# Altium PCB Source_Trans.PcbDoc
Units mil, origin at the board's own origin, x right, y up, seen from the top; angles counter-clockwise.
Board outline 2800 x 3145 mil, 2 copper layers (Top Layer, Bottom Layer); 21 components, 6 nets, 74 pads, 479 vias.
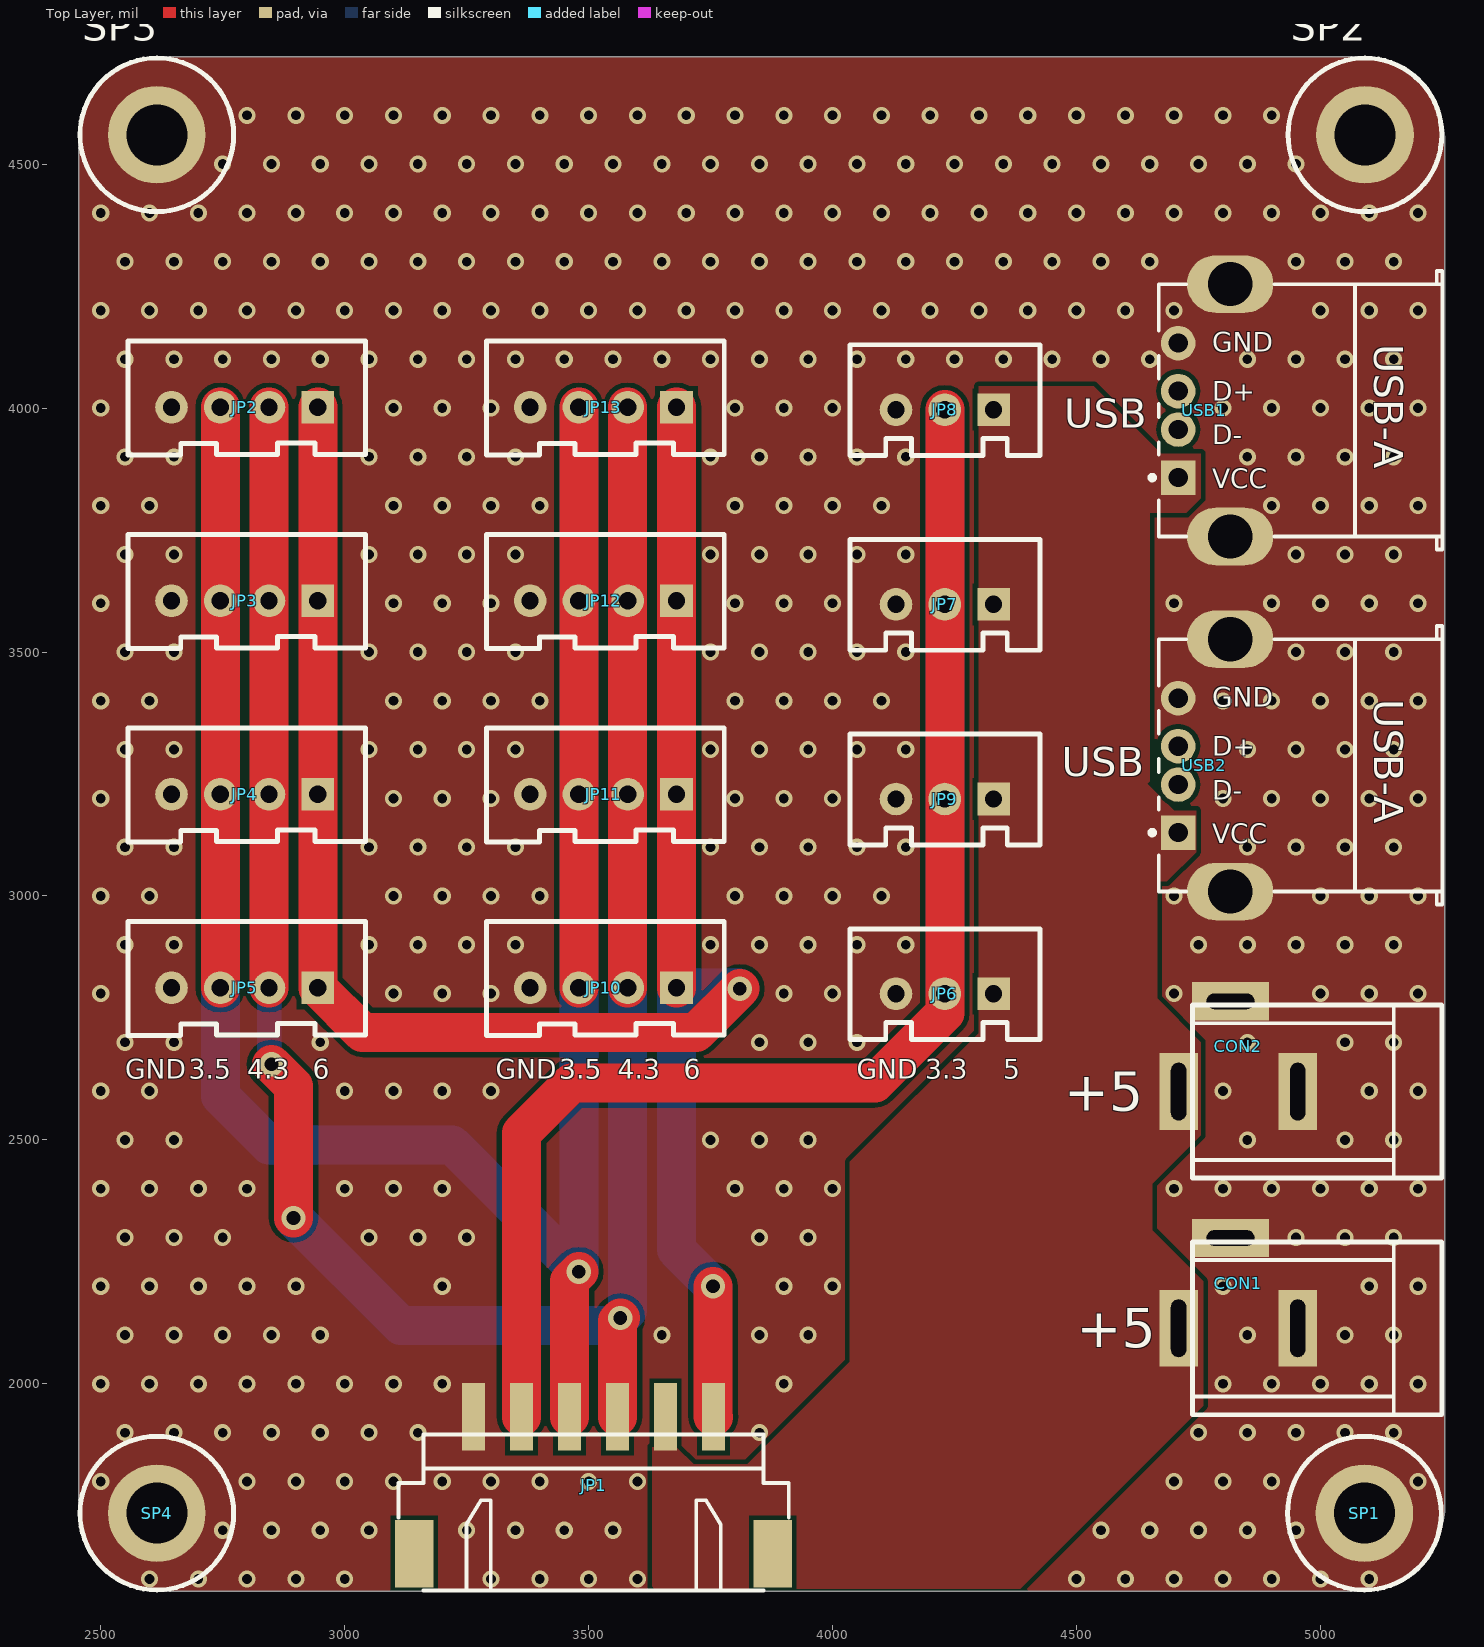
[diagram p0: Top Layer view]
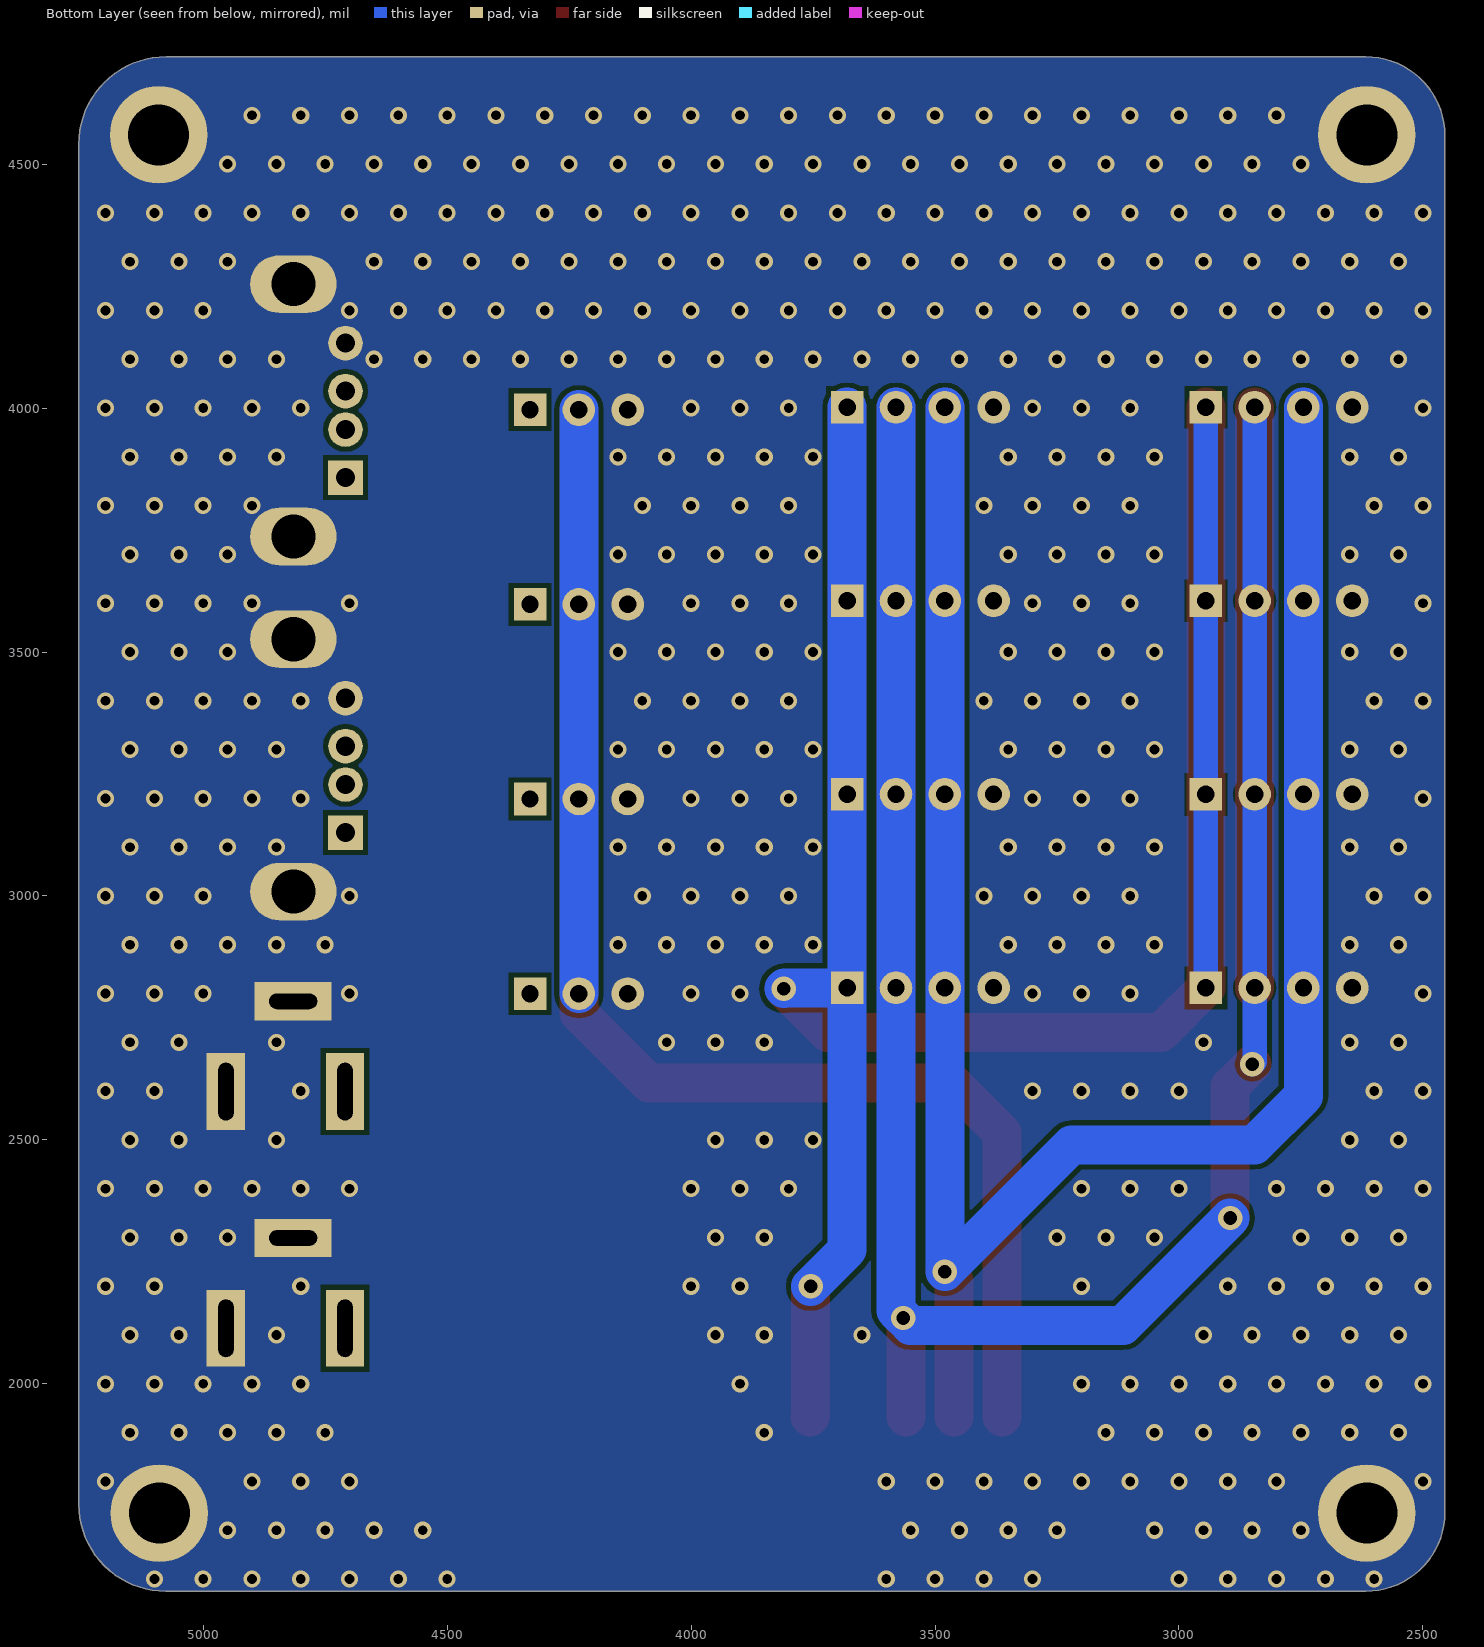
[diagram p1: Bottom Layer view, seen from below]
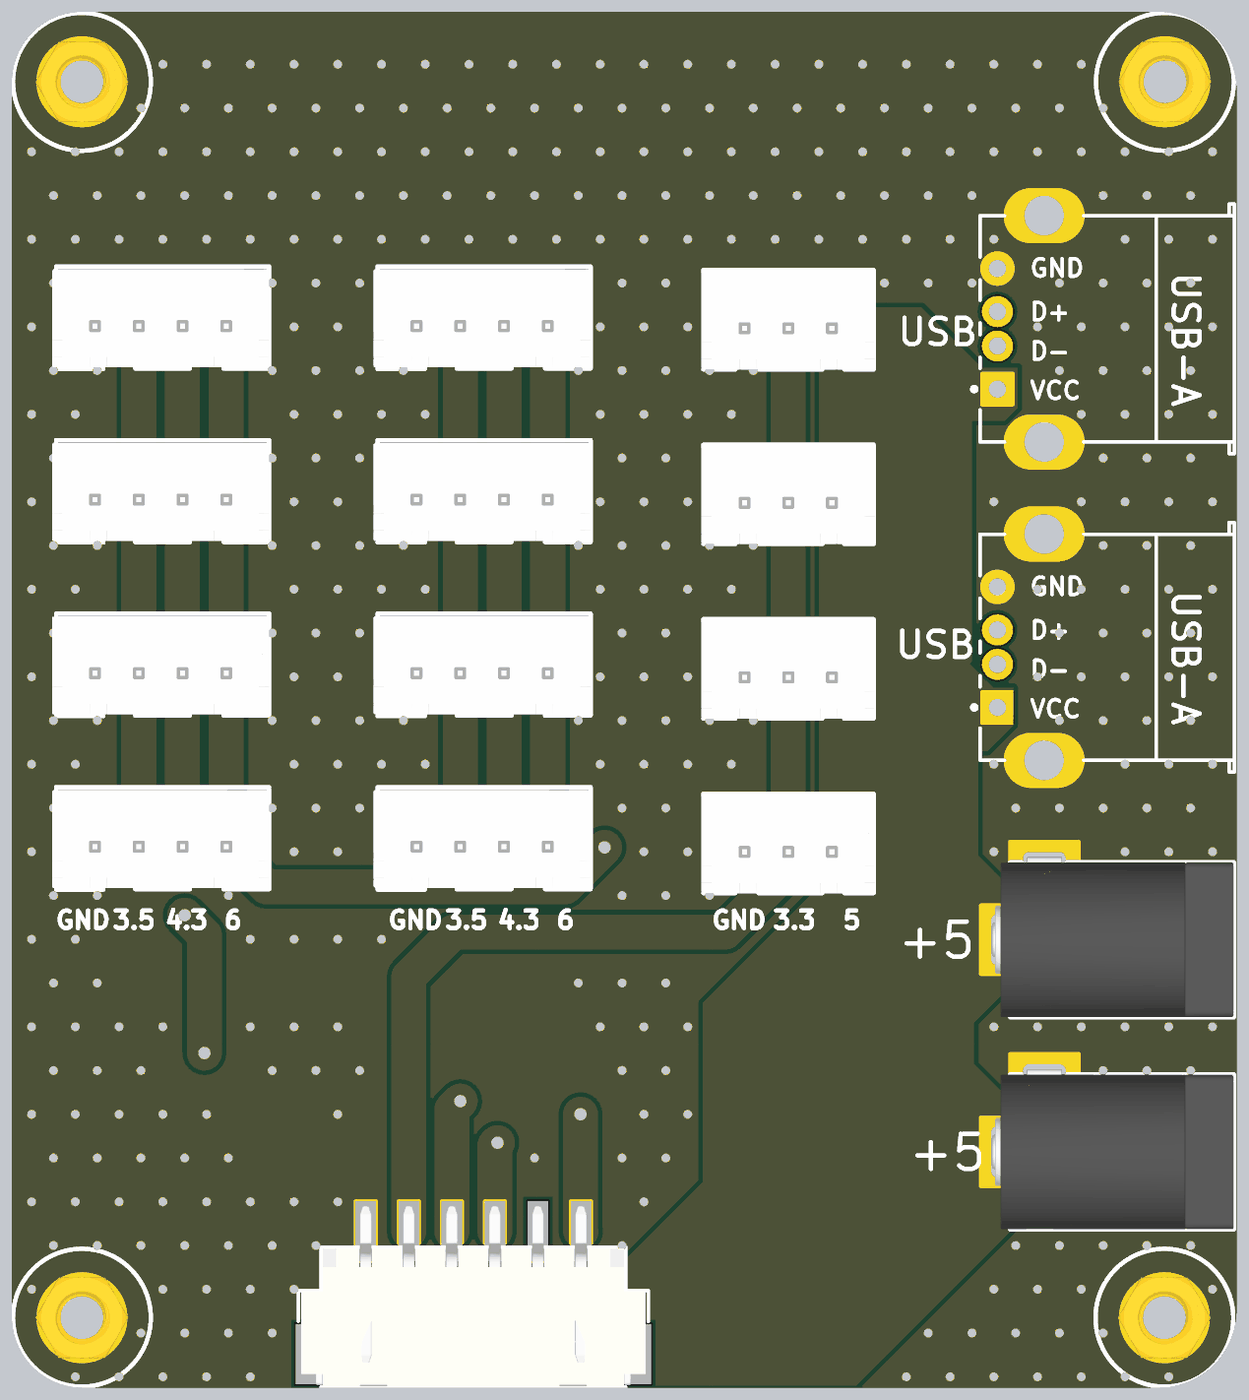
[diagram p2: 3D render of the assembled board from above, using the file's embedded part models]

## Layer stack, top to bottom
Top Solder: solder mask 0.4, Solder Resist, Dk 3.5
Top Layer: signal copper 1.4
Dielectric 1: dielectric 12.6, FR-4, Dk 4.8
Bottom Layer: signal copper 1.4
Bottom Solder: solder mask 0.4, Solder Resist, Dk 3.5

## Board outline
2455,1737.08 2455,4557.92 cw(c2617.08,4557.92) 2617.08,4720 5075.84,4720 cw(c5075.84,4540.84) 5255,4540.84 5255,1753.48 cw(c5076.52,1753.48) 5076.52,1575 2617.08,1575 cw(c2617.08,1737.08)

## Design rules (kind name [scope] priority, off if disabled: settings)
Clearance [All] p1: gap=10 ignorepadtopadclearanceinfootprint=FALSE except(0: Arc-Hole Track-Hole SMDPad-Hole THPad-Hole Via-Hole Fill-Hole Poly-Hole Region-Hole Text-Hole)
PolygonConnect [All] p1: connectstyle=Direct reliefconductorwidth=10 reliefentries=4 polygonreliefangle="90 Angle" airgapwidth=10
RoutingVias [All] p1: holewidth=28 width=50 viastyle="Through Hole" minholewidth=28 minwidth=50 maxholewidth=28 maxwidth=50
SolderMaskExpansion [All] p1: expansion=4 istentingtop=FALSE
Width [All] p1: maxlimit=80 minlimit=10 preferedwidth=10 minimp=50.000000 maximp=50.000000 favimp=50.000000
30 further rules are at their usual default settings.

## Components (designator, comment, footprint, x,y, rotation, side; value= is the part's Value field where it differs from the comment)
CON1 "3.5*1.3" DC-005 4953.39,2113.99 r0 top
CON2 "3.5*1.3" DC-005 4953.39,2598.99 r0 top
JP1 "HDR-1X6" XH2.54-WS-6P 3510,1736.46 r0 top
JP2 "HDR-1X4" XH2.54-LI-4P 2795,4001.67 r180 top
JP3 "HDR-1X4" XH2.54-LI-4P 2795,3605 r180 top
JP4 "HDR-1X4" XH2.54-LI-4P 2795,3208.33 r180 top
JP5 "HDR-1X4" XH2.54-LI-4P 2795,2811.67 r180 top
JP6 "HDR-1X3" XH2.54-LI-3P 4230,2799.67 r180 top
JP7 "HDR-1X3" XH2.54-LI-3P 4230,3597.67 r180 top
JP8 "HDR-1X3" XH2.54-LI-3P 4230,3996.67 r180 top
JP9 "HDR-1X3" XH2.54-LI-3P 4230,3198.67 r180 top
JP10 "HDR-1X4" XH2.54-LI-4P 3530,2811.67 r180 top
JP11 "HDR-1X4" XH2.54-LI-4P 3530,3208.33 r180 top
JP12 "HDR-1X4" XH2.54-LI-4P 3530,3605 r180 top
JP13 "HDR-1X4" XH2.54-LI-4P 3530,4001.67 r180 top
SP1 "M3铜柱" M3x4_L 5090,1735 r0 top
SP2 "M3铜柱" M3x4_L 5091.18,4560 r0 top
SP3 "M3铜柱" M3x4_L 2615,4560 r0 top
SP4 "M3铜柱" M3x4_L 2615,1735 r0 top
USB1 "USB" USB-A/S_A 4708.31,3995.33 r0 top
USB2 "USB" USB-A/S_A 4708.31,3267.65 r0 top

## Footprints (in the part's own frame and the unit in brackets; to place one, negate y for a bottom-side part, rotate by r counter-clockwise, add the part's x,y. Pads: shape width x height; smd on the part's side, far side on the other; paste and mask are expansions set on the pad)
DC-005 [mm] "5.5*2.1mm，DC30V,2.5A"
  rect 2x4 hole 0.8 slot 3 at 90 deg: 1(-6.2,0) 2(0,0)
  rect 4x2 hole 0.8 slot 2.5 at 0 deg: 3(-3.5,4.7)
  silkscreen extent -5.48,-4.5 7.5,4.5, body extent -6.55,-4.5 7.5,4.8, height 11.2
M3x4_L [mil] "M3铜柱，长：4mm"
  round 200 hole 125: 1(0,0)
  silkscreen extent -157,-157 157,157, body extent -106,-93 106,93, height 159
USB-A/S_A [mm] "A型直插母头，"
  rect 1.8x1.8 hole 1: 1(0,-3.5)
  round 1.8 hole 1: 2(0,-1) 3(0,1) 4(0,3.5)
  oval 4.5x3 hole 2.3: 4(2.71,-6.57) 4(2.71,6.57)
  silkscreen extent -1.47,-7.25 13.75,7.25, body extent -0.6,-7.34 13.7,7.34, height 6.8
XH2.54-LI-3P [mm] "接插件，3P"
  rect 1.7x1.7 hole 0.9: 1(-2.54,0)
  round 1.7 hole 0.9: 2(0,0) 3(2.54,0)
  silkscreen extent -4.95,-3.38 4.93,2.39, body extent -5.04,-3.3 5.04,2.4, height 7.03
XH2.54-LI-4P [mm] "接插件，4P"
  rect 1.7x1.7 hole 0.9: 1(-3.81,0)
  round 1.7 hole 0.9: 2(-1.27,0) 3(1.27,0) 4(3.81,0)
  silkscreen extent -6.3,-3.45 6.07,2.49, body extent -6.31,-3.3 6.31,2.4, height 7.03
XH2.54-WS-6P [mm] "长：20mm，宽：8mm，高：6.1mm"
  rect 2x3.5 smd: 0(-9.327,-2.15) 0(9.327,-2.15)
  rect 1.2x3.5 smd: 1(-6.25,4.981) 2(-3.75,4.981) 3(-1.25,4.981) 4(1.25,4.981) 5(3.75,4.981) 6(6.25,4.981)
  silkscreen extent -10.16,-4.06 10.16,4.06, body extent -10,-4 10,6.42, height 6.05

## Part data
CON1 CON2: library part P-DC, "低压电源接口", BOM名称=DC电源接口
JP1: library part "Header 6", "6P接插件", BOM名称=6P接插件
JP2 JP3 JP4 JP5 JP10 JP11 JP12 JP13: library part "Header 4", "4P接插件", BOM名称=4P接插件
JP6 JP7 JP8 JP9: library part "Header 3", "3P接插件", BOM名称=3P接插件
SP1 SP2 SP3 SP4: library part 铜柱小焊盘, "铜柱", BOM名称=铜柱
USB1 USB2: library part USB-A/S, "USB-A型母接口", BOM名称=USB-A型母接口

## Via types
v1: diameter 35, hole 20, Top Layer to Bottom Layer, tented both sides, 473 vias
v2: diameter 50, hole 28, Top Layer to Bottom Layer, tented both sides, 6 vias

## Nets (pads, with @x,y where several pads share a name; then routed paths per layer and width w, separated by ;. In a path a pad name is that pad's centre, name@x,y a point inside that pad or via, vN(x,y) a via of type N, cw(c..) or ccw(c..) an arc to the next point about the centre after c; other vN are vias at no path point)
3.3: JP1.2 JP6.2 JP7.2 JP8.2 JP9.2 | length 3984.7
  Top Layer w80: JP1.2 3362.36,2514.03 3465,2616.67 4086.67,2616.67 4230,2760 JP6.2 JP9.2 JP7.2 JP8.2
  Bottom Layer w80: JP6.2 JP9.2 JP7.2 JP8.2
3.5: JP1.3 JP2.3 JP3.3 JP4.3 JP5.3 JP10.3 JP11.3 JP12.3 JP13.3 | length 6752.8
  Top Layer w80: JP5.3 JP4.3 JP3.3 JP2.3 ; JP1.3 3460.79,2210.79 v2(3480,2230) ; JP10.3 JP11.3 JP12.3 JP13.3
  Bottom Layer w80: JP2.3 JP3.3 JP4.3 JP5.3 2745,2590 2845,2490 3220,2490 v2(3480,2230) JP11.3 JP12.3 JP13.3
4.3: JP1.4 JP2.2 JP3.2 JP4.2 JP5.2 JP10.2 JP11.2 JP12.2 JP13.2 | length 6907.4
  Top Layer w80: JP5.2 JP4.2 JP3.2 JP2.2 ; v2(2850,2655) 2895,2610 v2(2895,2340) ; JP1.4 3559.21,2129.21 v2(3565,2135) ; JP10.2 JP11.2 JP12.2 JP13.2
  Bottom Layer w50: JP2.2 JP3.2 JP4.2 JP5.2 2845,2660 v2(2850,2655)
  Bottom Layer w80: v2(2895,2340) 3115,2120 3550,2120 3580,2150 JP10.2 JP11.2 JP12.2 JP13.2
6: JP1.6 JP2.1 JP3.1 JP4.1 JP5.1 JP10.1 JP11.1 JP12.1 JP13.1 | length 6741.6
  Top Layer w80: JP2.1 JP3.1 JP4.1 JP5.1 3036.67,2720 3720,2720 v2(3810,2810) ; JP10.1 JP11.1 JP12.1 JP13.1 ; v2(3755,2200) 3755,1933.62 JP1.6
  Bottom Layer w50: JP5.1 JP4.1 JP3.1 JP2.1
  Bottom Layer w80: JP13.1 JP12.1 JP11.1 JP10.1 ; v2(3755,2200) 3680,2275 JP10.1 ; v2(3810,2810) 3808.33,2811.67 JP10.1
+5: CON1.1 CON2.1 JP1.5 JP6.1 JP7.1 JP8.1 JP9.1 USB1.1 USB2.1
GND: CON1.2 CON1.3 CON2.2 CON2.3 JP1.1 JP2.4 JP3.4 JP4.4 JP5.4 JP6.3 JP7.3 JP8.3 JP9.3 JP10.4 JP11.4 JP12.4 JP13.4 SP1.1 SP2.1 SP3.1 SP4.1 USB1.4 USB2.4
  other v1: 2600,1600 2700,1600 2800,1600 2900,1600 3000,1600 3300,1600 3400,1600 3500,1600 3600,1600 4500,1600 4600,1600 4700,1600 4800,1600 4900,1600 5000,1600 5100,1600 2750,1700 2850,1700 2950,1700 3050,1700 3250,1700 3350,1700 3450,1700 3550,1700 4550,1700 4650,1700 4750,1700 4850,1700 4950,1700 2500,1800 2800,1800 2900,1800 3000,1800 3100,1800 3200,1800 3300,1800 3400,1800 3500,1800 3600,1800 4700,1800 4800,1800 4900,1800 5200,1800 2550,1900 2650,1900 2750,1900 2850,1900 2950,1900 3050,1900 3150,1900 3850,1900 4750,1900 4850,1900 4950,1900 5050,1900 5150,1900 2500,2000 2600,2000 2700,2000 2800,2000 2900,2000 3000,2000 3100,2000 3200,2000 3900,2000 4800,2000 4900,2000 5000,2000 5100,2000 5200,2000 2550,2100 2650,2100 2750,2100 2850,2100 2950,2100 3650,2100 3850,2100 3950,2100 4850,2100 5050,2100 5150,2100 2500,2200 2600,2200 2700,2200 2800,2200 2900,2200 3200,2200 3900,2200 4000,2200 4800,2200 5100,2200 5200,2200 2550,2300 2650,2300 2750,2300 3050,2300 3150,2300 3250,2300 3850,2300 3950,2300 4950,2300 5050,2300 5150,2300 2500,2400 2600,2400 2700,2400 2800,2400 3000,2400 3100,2400 3200,2400 3800,2400 3900,2400 4000,2400 4700,2400 4800,2400 4900,2400 5000,2400 5100,2400 5200,2400 2550,2500 2650,2500 3750,2500 3850,2500 3950,2500 4850,2500 5050,2500 5150,2500 2500,2600 2600,2600 3000,2600 3100,2600 3200,2600 3300,2600 4800,2600 5100,2600 5200,2600 2550,2700 2650,2700 2950,2700 3850,2700 3950,2700 4050,2700 4850,2700 5050,2700 5150,2700 2500,2800 3100,2800 3200,2800 3300,2800 3900,2800 4000,2800 4700,2800 5000,2800 5100,2800 5200,2800 2550,2900 2650,2900 3050,2900 3150,2900 3250,2900 3350,2900 3750,2900 3850,2900 3950,2900 4050,2900 4150,2900 4750,2900 4850,2900 4950,2900 5050,2900 5150,2900 2500,3000 2600,3000 3100,3000 3200,3000 3300,3000 3400,3000 3800,3000 3900,3000 4000,3000 4100,3000 4700,3000 5000,3000 5100,3000 5200,3000 2550,3100 2650,3100 3050,3100 3150,3100 3250,3100 3350,3100 3750,3100 3850,3100 3950,3100 4050,3100 4150,3100 4850,3100 4950,3100 5050,3100 5150,3100 2500,3200 3100,3200 3200,3200 3300,3200 3800,3200 3900,3200 4000,3200 4800,3200 4900,3200 5000,3200 5100,3200 5200,3200 2550,3300 2650,3300 3050,3300 3150,3300 3250,3300 3350,3300 3750,3300 3850,3300 3950,3300 4050,3300 4150,3300 4850,3300 4950,3300 5050,3300 5150,3300 2500,3400 2600,3400 3100,3400 3200,3400 3300,3400 3400,3400 3800,3400 3900,3400 4000,3400 4100,3400 4800,3400 4900,3400 5000,3400 5100,3400 5200,3400 2550,3500 2650,3500 3050,3500 3150,3500 3250,3500 3350,3500 3750,3500 3850,3500 3950,3500 4050,3500 4150,3500 4950,3500 5050,3500 5150,3500 2500,3600 3100,3600 3200,3600 3300,3600 3800,3600 3900,3600 4000,3600 4700,3600 4900,3600 5000,3600 5100,3600 5200,3600 2550,3700 2650,3700 3050,3700 3150,3700 3250,3700 3350,3700 3750,3700 3850,3700 3950,3700 4050,3700 4150,3700 4950,3700 5050,3700 5150,3700 2500,3800 2600,3800 3100,3800 3200,3800 3300,3800 3400,3800 3800,3800 3900,3800 4000,3800 4100,3800 4900,3800 5000,3800 5100,3800 5200,3800 2550,3900 2650,3900 3050,3900 3150,3900 3250,3900 3350,3900 3750,3900 3850,3900 3950,3900 4050,3900 4150,3900 4850,3900 4950,3900 5050,3900 5150,3900 2500,4000 3100,4000 3200,4000 3300,4000 3800,4000 3900,4000 4000,4000 4800,4000 4900,4000 5000,4000 5100,4000 5200,4000 2550,4100 2650,4100 2750,4100 2850,4100 2950,4100 3050,4100 3150,4100 3250,4100 3350,4100 3450,4100 3550,4100 3650,4100 3750,4100 3850,4100 3950,4100 4050,4100 4150,4100 4250,4100 4350,4100 4450,4100 4550,4100 4650,4100 4850,4100 4950,4100 5050,4100 5150,4100 2500,4200 2600,4200 2700,4200 2800,4200 2900,4200 3000,4200 3100,4200 3200,4200 3300,4200 3400,4200 3500,4200 3600,4200 3700,4200 3800,4200 3900,4200 4000,4200 4100,4200 4200,4200 4300,4200 4400,4200 4500,4200 4600,4200 4700,4200 5000,4200 5100,4200 5200,4200 2550,4300 2650,4300 2750,4300 2850,4300 2950,4300 3050,4300 3150,4300 3250,4300 3350,4300 3450,4300 3550,4300 3650,4300 3750,4300 3850,4300 3950,4300 4050,4300 4150,4300 4250,4300 4350,4300 4450,4300 4550,4300 4650,4300 4950,4300 5050,4300 5150,4300 2500,4400 2600,4400 2700,4400 2800,4400 2900,4400 3000,4400 3100,4400 3200,4400 3300,4400 3400,4400 3500,4400 3600,4400 3700,4400 3800,4400 3900,4400 4000,4400 4100,4400 4200,4400 4300,4400 4400,4400 4500,4400 4600,4400 4700,4400 4800,4400 4900,4400 5000,4400 5100,4400 5200,4400 2750,4500 2850,4500 2950,4500 3050,4500 3150,4500 3250,4500 3350,4500 3450,4500 3550,4500 3650,4500 3750,4500 3850,4500 3950,4500 4050,4500 4150,4500 4250,4500 4350,4500 4450,4500 4550,4500 4650,4500 4750,4500 4850,4500 4950,4500 2800,4600 2900,4600 3000,4600 3100,4600 3200,4600 3300,4600 3400,4600 3500,4600 3600,4600 3700,4600 3800,4600 3900,4600 4000,4600 4100,4600 4200,4600 4300,4600 4400,4600 4500,4600 4600,4600 4700,4600 4800,4600 4900,4600
pads on no net: JP1.0 USB1.2 USB1.3 USB2.2 USB2.3

## Polygon pours and split planes (outlines as drawn)
GND on Top Layer "GND_L01_P002" (solid, pour order 2): 2455,1737.08 2455,4557.92 cw(c2617.08,4557.92) 2617.08,4720 5075.84,4720 cw(c5075.84,4540.84) 5255,4540.84 5255,1753.48 cw(c5076.52,1753.48) 5076.52,1575 2617.08,1575 cw(c2617.08,1737.08)
+5 on Top Layer "+5_L01_P001" (solid, pour order 1): 4305,1580 4385,1580 4760,1955 4760,2210 4655,2315 4655,2410 4755,2510 4755,2700 4665,2790 4665,3030 4685,3030 4745,3090 4745,3110 4745,3175 4700,3175 4645,3230 4650,3235 4650,3785 4725,3785 4755,3815 4755,3850 4755,3906.67 4673.33,3906.67 4535,4045 4300,4045 4300,2630
+5 on Top Layer "+5_L01_P000" (solid, pour order 0): 3680,1870 3715,1835 3825,1835 4035,2045 4035,2455 4315,2735 4315,1580 3635,1580 3630,1585 3630,1870
GND on Bottom Layer "GND_L02_P003" (solid, pour order 3): 2455,1737.08 2455,4557.92 cw(c2617.08,4557.92) 2617.08,4720 5075.84,4720 cw(c5075.84,4540.84) 5255,4540.84 5255,1753.48 cw(c5076.52,1753.48) 5076.52,1575 2617.08,1575 cw(c2617.08,1737.08)

## Silkscreen, mask and mechanical layers (free items; w line width, h text height)
Top Overlay:
  text "USB" at 4475,3960 h60
  text "USB" at 4470,3245 h60
  text "GND" at 2550,2625 h40
  text "3.5" at 2680,2625 h40
  text "4.3" at 2800,2625 h40
  text "6" at 2935,2625 h40
  text "GND" at 3310,2625 h40
  text "3.5" at 3440,2625 h40
  text "4.3" at 3560,2625 h40
  text "6" at 3695,2625 h40
  text "GND" at 4050,2625 h40
  text "3.3" at 4190,2625 h40
  text "5" at 4350,2625 h40
  text "+5" at 4475,2560 h80
  text "+5" at 4500,2075 h80
Mechanical 1:
  the board outline again, w10

## Text inside footprints (layer, text, board x,y; h text height)
USB1: Top Overlay "USB-A" at 5110.28,4130.37 h60 r270; Top Overlay "VCC" at 4778.31,3835.33 h40; Top Overlay "D-" at 4778.31,3925.33 h40; Top Overlay "D+" at 4778.31,4015.33 h40; Top Overlay "GND" at 4778.31,4115.33 h40
USB2: Top Overlay "USB-A" at 5110.28,3402.69 h60 r270; Top Overlay "VCC" at 4778.31,3107.65 h40; Top Overlay "D-" at 4778.31,3197.65 h40; Top Overlay "D+" at 4778.31,3287.65 h40; Top Overlay "GND" at 4778.31,3387.65 h40